# Altium PCB machcauH.PcbDoc
Units mm, origin at the board's own origin, x right, y up, seen from the top; angles counter-clockwise.
Board outline 60 x 60 mm, 2 copper layers (Top Layer, Bottom Layer); 34 components, 30 nets, 89 pads, 8 vias.
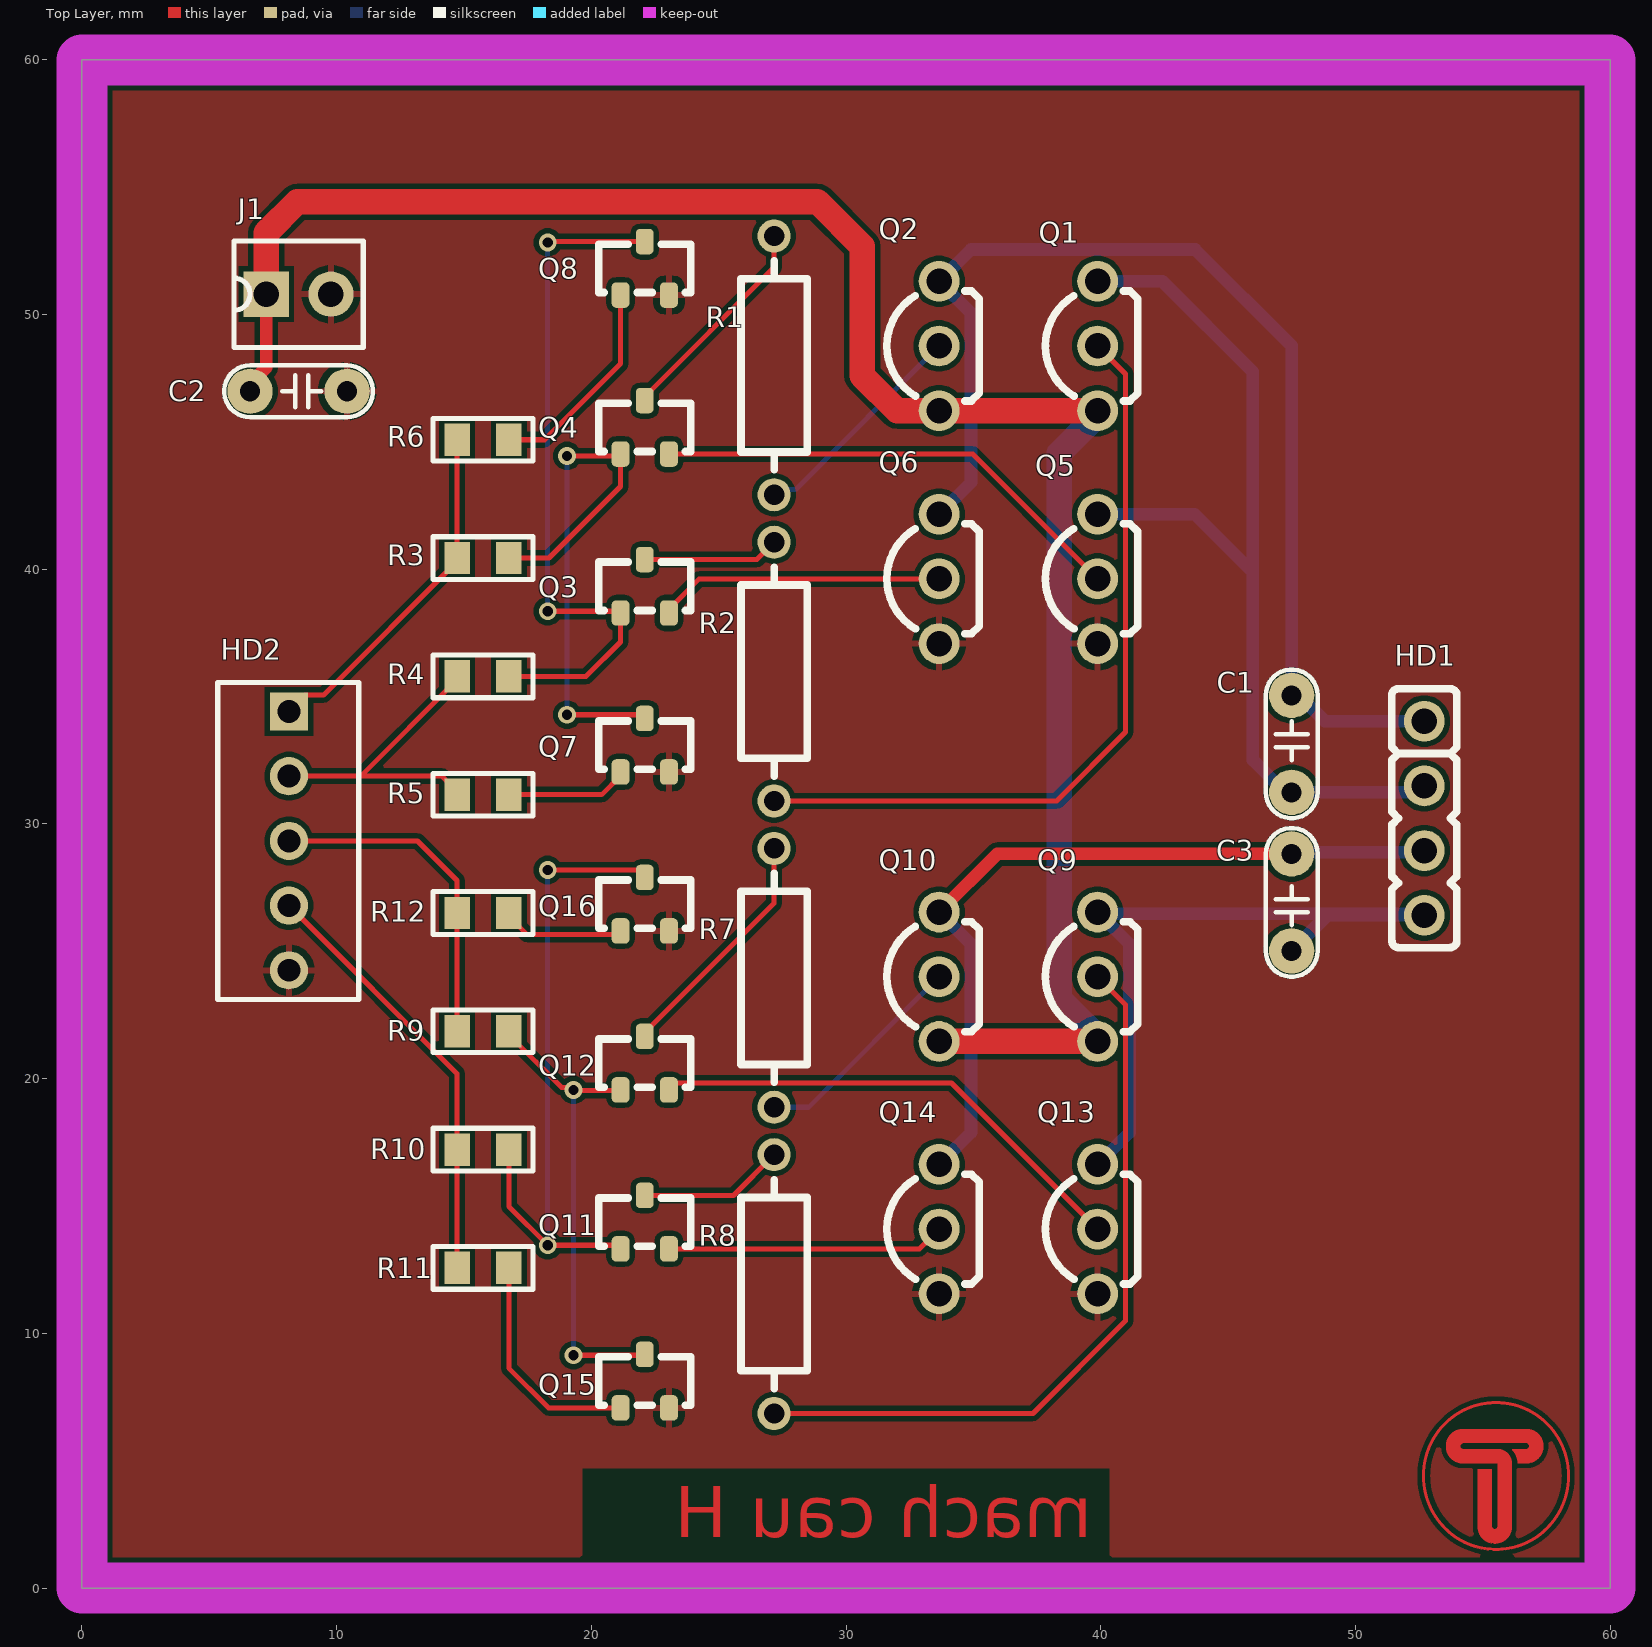
[diagram p0: Top Layer view]
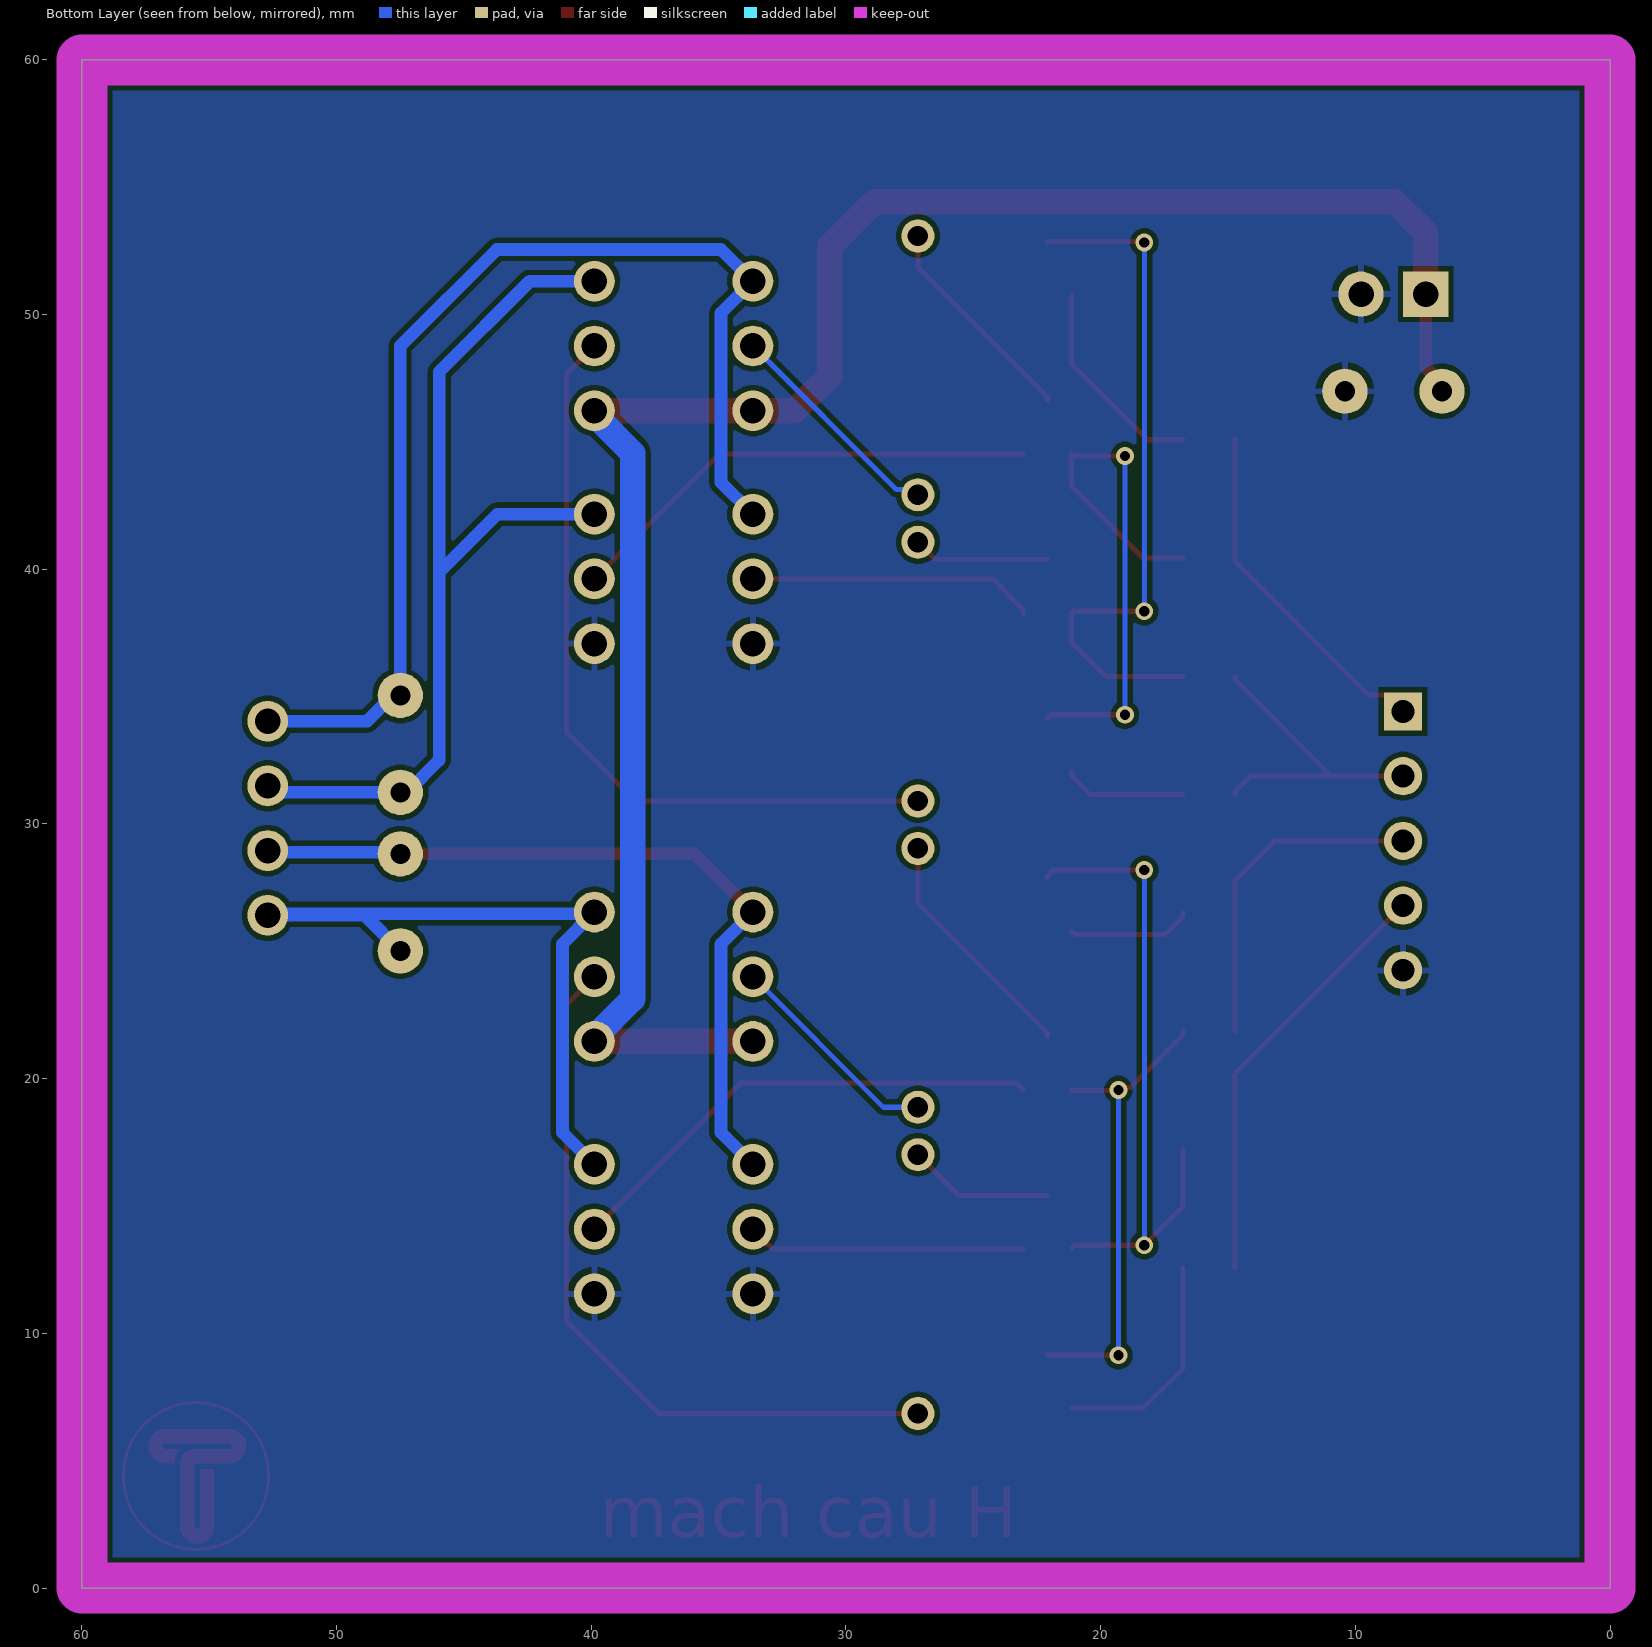
[diagram p1: Bottom Layer view, seen from below]
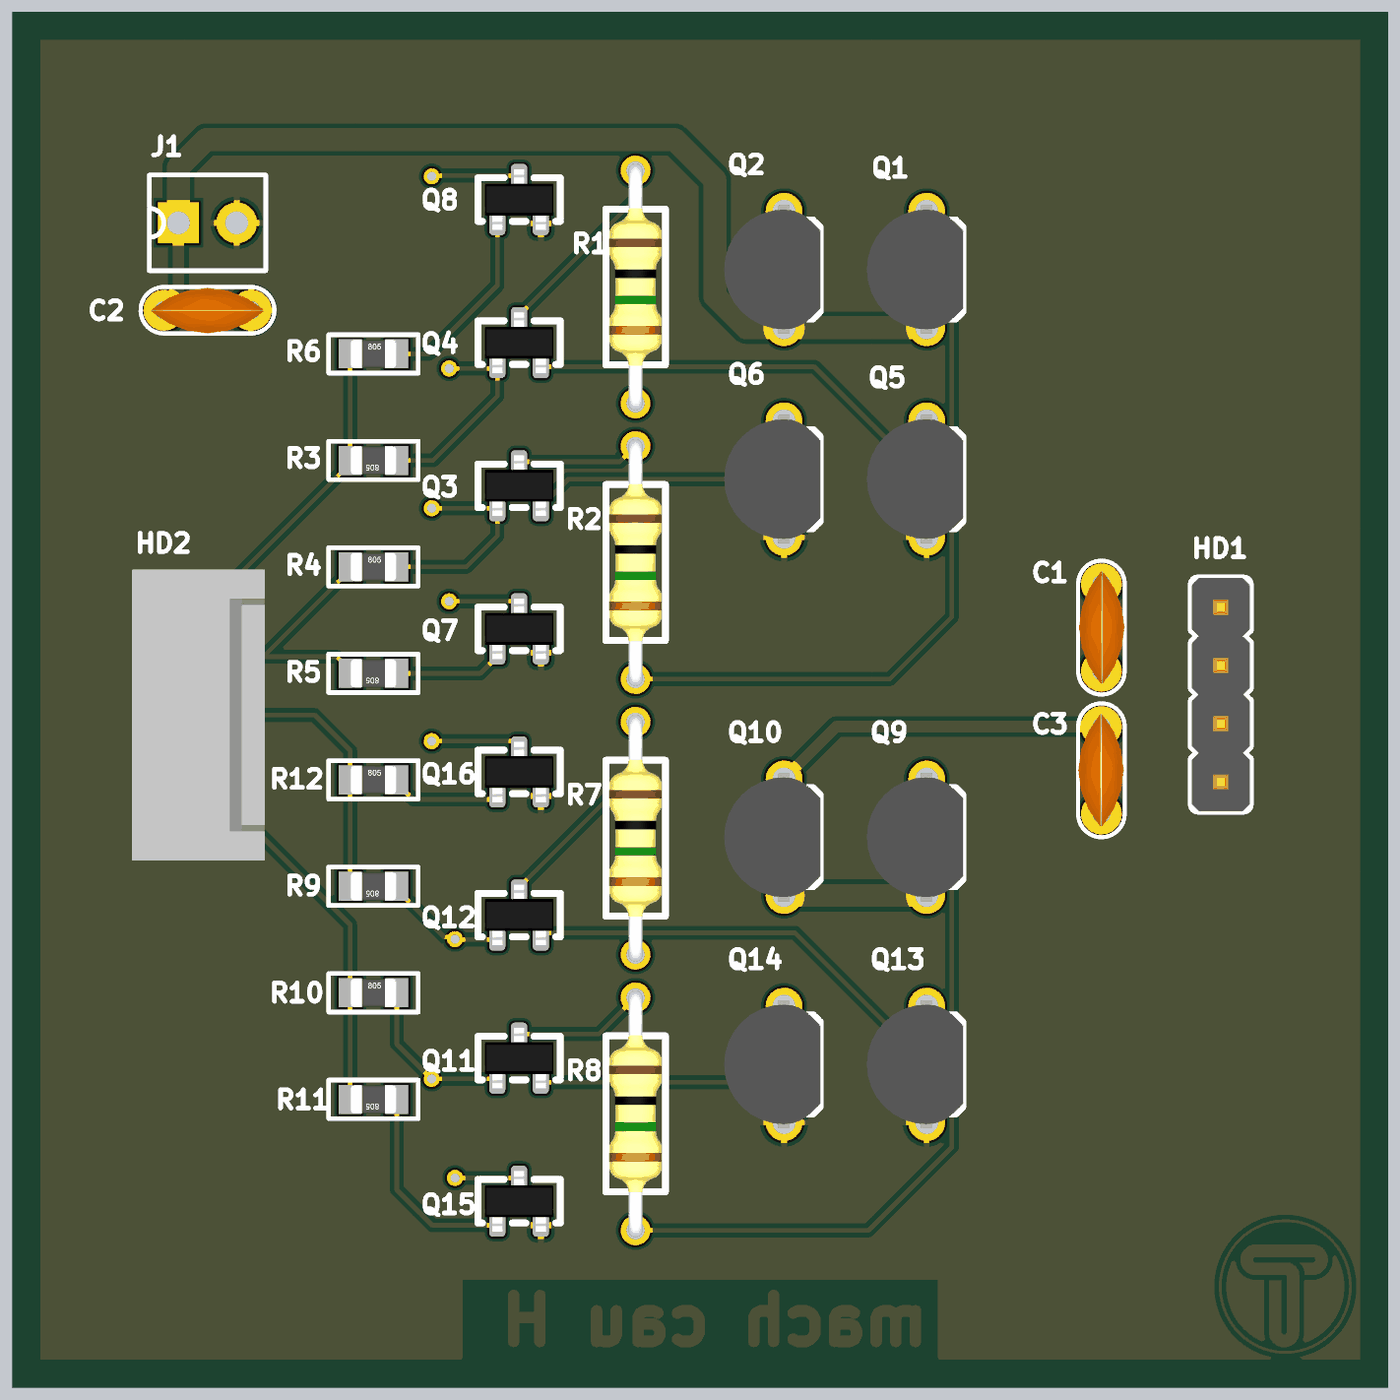
[diagram p2: 3D render of the assembled board from above, using the file's embedded part models]

## Layer stack, top to bottom
Top Solder: solder mask 0.0102, Solder Resist, Dk 3.5
Top Layer: signal copper 0.0356
Dielectric 1: dielectric 0.32, FR-4, Dk 4.8
Bottom Layer: signal copper 0.0356
Bottom Solder: solder mask 0.0102, Solder Resist, Dk 3.5

## Board outline
0,0 0,60 60,60 60,0

## Design rules (kind name [scope] priority, off if disabled: settings)
Clearance [All] p1: gap=0.2 ignorepadtopadclearanceinfootprint=FALSE
PolygonConnect [All] p1: connectstyle=Relief reliefconductorwidth=0.254 reliefentries=4 polygonreliefangle="90 Angle" airgapwidth=0.254
RoutingVias RoutingVias_power [InNetClass('Power_class')] p1: holewidth=0.7 width=1.1 viastyle="Through Hole" minholewidth=0.7 minwidth=1.1 maxholewidth=0.7 maxwidth=1.1
RoutingVias RoutingVias_signal [All] p2: holewidth=0.4 width=0.7 viastyle="Through Hole" minholewidth=0.4 minwidth=0.7 maxholewidth=0.4 maxwidth=0.7
SolderMaskExpansion [All] p1: expansion=0.102 istentingtop=FALSE
Width Width_power [InNetClass('Power_class')] p1: maxlimit=2 minlimit=0.5 preferedwidth=1
Width Width_signal [All] p2: maxlimit=0.2 minlimit=0.2 preferedwidth=0.2
30 further rules are at their usual default settings.

## Classes and differential pairs
net class Power_class: GND M_A M_B M_C M_D VCC

## Components (designator, comment, footprint, x,y, rotation, side; value= is the part's Value field where it differs from the comment)
C1 "103" CN1.5#1 47.498,35.052 r270 top value=0.01uF
C2 "103" CN1.5#2 10.414,46.99 r180 top value=0.01uF
C3 "103" CN1.5#1 47.498,25.019 r90 top value=0.01uF
HD1 "Header 4" Header_4 52.705,30.226 r270 top
HD2 "Header5" HDR5 8.128,34.417 r270 top
J1 "JP2" CON2 7.239,50.8 r90 top value="Connector 2"
Q1 "SS8550" SS8550 39.878,48.768 r90 top
Q2 "SS8550" SS8550 33.655,48.768 r90 top
Q3 "2SC1815-HF" 2SC1815-HF 22.098,39.334 r0 top
Q4 "2SC1815-HF" 2SC1815-HF 22.098,45.575 r0 top
Q5 "SS8050" SS8050 39.878,39.624 r90 top
Q6 "SS8050" SS8050 33.655,39.624 r90 top
Q7 "2SC1815-HF" 2SC1815-HF 22.098,33.093 r0 top
Q8 "2SC1815-HF" 2SC1815-HF 22.098,51.816 r0 top
Q9 "SS8550" SS8550 39.878,24.003 r90 top
Q10 "SS8550" SS8550 33.655,24.003 r90 top
Q11 "2SC1815-HF" 2SC1815-HF 22.098,14.369 r0 top
Q12 "2SC1815-HF" 2SC1815-HF 22.098,20.61 r0 top
Q13 "SS8050" SS8050 39.878,14.097 r90 top
Q14 "SS8050" SS8050 33.655,14.097 r90 top
Q15 "2SC1815-HF" 2SC1815-HF 22.098,8.128 r0 top
Q16 "2SC1815-HF" 2SC1815-HF 22.098,26.851 r0 top
R1 "Res2" "RES 1/4W CFR25" 27.178,53.086 r270 top value=1K
R2 "Res2" "RES 1/4W CFR25" 27.178,41.063 r270 top value=1K
R3 "R0603" "DIEN TRO 0805" 15.748,40.44 r0 top value="2K2, 1/8W"
R4 "R0603" "DIEN TRO 0805" 15.748,35.796 r180 top value="2K2, 1/8W"
R5 "R0603" "DIEN TRO 0805" 15.748,31.151 r0 top value="2K2, 1/8W"
R6 "R0603" "DIEN TRO 0805" 15.748,45.085 r180 top value="2K2, 1/8W"
R7 "Res2" "RES 1/4W CFR25" 27.178,29.041 r270 top value=1K
R8 "Res2" "RES 1/4W CFR25" 27.178,17.018 r270 top value=1K
R9 "R0603" "DIEN TRO 0805" 15.748,21.862 r0 top value="2K2, 1/8W"
R10 "R0603" "DIEN TRO 0805" 15.748,17.218 r180 top value="2K2, 1/8W"
R11 "R0603" "DIEN TRO 0805" 15.748,12.573 r0 top value="2K2, 1/8W"
R12 "R0603" "DIEN TRO 0805" 15.748,26.507 r180 top value="2K2, 1/8W"

## Footprints (in the part's own frame and the unit in brackets; to place one, negate y for a bottom-side part, rotate by r counter-clockwise, add the part's x,y. Pads: shape width x height; smd on the part's side, far side on the other; paste and mask are expansions set on the pad)
2SC1815-HF [mm] "SOT23-3"
  rrect50% 0.7x1 smd: 1(-0.95,-1.05) 2(0.95,-1.05) 3(0,1.05)
  silkscreen extent -1.8,-0.95 1.8,0.95, body extent -1.5,-1.32 1.5,1.32, height 1.08
CN1.5#1 [mil]
  round 70 hole 31: 1(0,0) 2(150,0)
  silkscreen extent -40,-40 190,40, body extent -22,-39 172,40, height 254
CN1.5#2 [mil]
  round 70 hole 31: 1(0,0)
  round 70 hole 30.98: 2(150,0)
  silkscreen extent -40,-40 190,40, body extent -22,-39 172,40, height 254
CON2 [mil]
  rect 70x70 hole 39.37 unplated: 1(0,0)
  round 70 hole 39.37 unplated: 2(0,-100)
  silkscreen extent -82,-150 82,50
"DIEN TRO 0805" [mm] "Chip Resistor; Body 2.0 x 1.3 mm (LxW typ)"
  rect 1x1.27 smd: 1(-1.016,0) 2(1.016,0)
  silkscreen extent -1.96,-0.84 1.96,0.84, body extent -1,-0.62 1,0.63, height 0.78
HDR5 [mm] "Connector; Header; 5 Position"
  rect 1.5x1.5 hole 0.9: 1(0,0)
  round 1.5 hole 0.9: 2(2.54,0) 3(5.08,0) 4(7.62,0) 5(10.16,0)
  silkscreen extent -1.14,-2.79 11.3,2.74, body extent -1.27,-2.92 11.43,2.88, height 11.72
Header_4 [mm] "Connector DIP, 4Pin_2.54mm"
  round 1.6 hole 1 mask+0.1: 1(-3.81,0) 2(-1.27,0) 3(1.27,0) 4(3.81,0)
  silkscreen extent -5.08,-1.28 5.08,1.28, body extent -5.08,-1.27 5.08,1.27, height 10.1
"RES 1/4W CFR25" [mm] "Axial Device, Thru-Hole; 2 Leads fi 0.55"
  round 1.3 hole 0.8 mask+0.1: 1(0,0) 2(10.16,0)
  silkscreen extent 0.98,-1.3 9.18,1.3, body extent -0.3,-1.16 10.47,1.16, height 2.93
SS8050 [mm] "TO-92 Bent Lead, Flat Index; 3 In-Line, Axial Leads; Body Dia. 4.5mm; Leads 0.51 x 0.48 mm (max)"
  round 1.6 hole 1 mask+0.1: 1(-2.54,0) 2(0,0) 3(2.54,0)
  silkscreen extent -2.16,-1.57 2.16,2.05, body extent -2.79,-1.59 2.79,2.61, height 10
SS8550 [mm] "TO-92 Bent Lead, Flat Index; 3 In-Line, Axial Leads; Body Dia. 4.5mm; Leads 0.51 x 0.48 mm (max)"
  round 1.6 hole 1 mask+0.1: 1(-2.54,0) 2(0,0) 3(2.54,0)
  silkscreen extent -2.16,-1.57 2.16,2.05, body extent -2.79,-1.59 2.79,2.61, height 10

## Part data
C1 C2 C3: library part CN1.5, "Cap np 682pF => 104pF"
HD1: library part Header4
HD2: "Header IDC, 5 x 1 Pin Vertical 2.54mm Pitch (Non-Boxed, Male)", Manufacturer="W¨¹rth Elektronik eiSos GmbH", partNo=613002143121, ComponentLink1 Description=Manufacturer, ComponentLink1URL=http://www.we-online.com, ComponentLink2 Description=Datasheet, ComponentLink2URL=http://katalog.we-online.de/em/datasheet/6130xx143121.pdf, Created by="Karrer Zheng", Created Date="29 March 2013", NoPins=02
J1: library part Con2, "Connector 2"
Q1 Q2 Q9 Q10: "Trans PNP -25V -1.5A TO-92", ComponentLink1Description=Datasheet, ComponentLink1URL="D:\Dropbox\Datasheets\Transistors\N Channel Bipolar\SS8550.pdf", Unit Price=0.0476
Q3 Q4 Q7 Q8 Q11 Q12 Q15 Q16: "Trans NPN 50V 150mA SOT-23", ComponentLink1Description=Datasheet, ComponentLink1URL="D:\Dropbox\Datasheets\Transistors\P Channel Bipolar\2SC1815-HF.pdf", Unit Price=0.0286
Q5 Q6 Q13 Q14: "Trans NPN 25V 1.5A TO-92", ComponentLink1Description=Datasheet, ComponentLink1URL="D:\Dropbox\Datasheets\Transistors\P Channel Bipolar\SS8050.pdf", Unit Price=0.0476
R1 R2 R7 R8: "Resistor", LatestRevisionDate=17-Jul-2002, LatestRevisionNote="Re-released for DXP Platform.", PackageDescription="Axial Device, Thru-Hole; 2 Leads; 0.4 in Pin Spacing", PackageReference=AXIAL-0.4, Published=8-Jun-2000, Publisher="Altium Limited"
R3 R4 R5 R6 R9 R10 R11 R12: "Resistor SMD 0603", LatestRevisionDate=17-Jul-2002, LatestRevisionNote="Re-released for DXP Platform.", PackageReference=AXIAL-0.4, Published=8-Jun-2000, Publisher="Altium Limited"

## Via types
v1: diameter 0.7, hole 0.4, Top Layer to Bottom Layer, 8 vias

## Nets (pads, with @x,y where several pads share a name; then routed paths per layer and width w, separated by ;. In a path a pad name is that pad's centre, name@x,y a point inside that pad or via, vN(x,y) a via of type N, cw(c..) or ccw(c..) an arc to the next point about the centre after c; other vN are vias at no path point)
GND: C2.1 HD2.5 J1.2 Q5.1 Q6.1 Q7.2 Q8.2 Q13.1 Q14.1 Q15.2 Q16.2
IN_A: HD2.1 R3.1 R6.2 | length 13.8
  Top Layer w0.2: HD2.1 8.778,35.067 9.494,35.067 14.732,40.305 R3.1 R6.2
IN_B: HD2.2 R4.2 R5.1 | length 12.5
  Top Layer w0.2: HD2.2 10.948,31.877 ; R5.1 14.732,31.286 14.141,31.877 10.948,31.877 ; R4.2 14.732,35.661 10.948,31.877
IN_C: HD2.3 R9.1 R12.2 | length 13.2
  Top Layer w0.2: HD2.3 13.174,29.337 14.732,27.779 R9.1
IN_D: HD2.4 R10.2 R11.1 | length 17
  Top Layer w0.2: HD2.4 14.732,20.193 R10.2 R11.1
M_A: C1.1 HD1.1 Q2.3 Q6.3 | length 45.5
  Bottom Layer w0.5: Q6.3 34.905,43.414 34.905,50.058 Q2.3 34.905,52.558 43.708,52.558 47.498,48.768 C1.1 47.784,35.052 48.8,34.036 HD1.1
M_B: C1.2 HD1.2 Q1.3 Q5.3 | length 37.2
  Bottom Layer w0.5: Q5.3 43.688,42.164 45.974,39.878 ; Q1.3 42.418,51.308 45.974,47.752 45.974,39.878 ; HD1.2 52.407,31.496 52.153,31.242 47.244,31.242 45.974,32.512 45.974,39.878
M_C: C3.2 HD1.3 Q10.3 Q14.3 | length 31
  Top Layer w0.5: Q10.3 35.941,28.829 C3.2
  Bottom Layer w0.5: Q14.3 34.905,17.887 34.905,25.293 Q10.3 ; C3.2 47.561,28.892 52.642,28.892 HD1.3
M_D: C3.1 HD1.4 Q9.3 Q13.3 | length 29.4
  Bottom Layer w0.5: Q13.3 41.128,17.887 41.128,25.293 Q9.3@39.941,26.479 ; Q9.3 Q9.3@39.941,26.479 ; C3.1 48.895,26.416 HD1.4 ; HD1.4@52.642,26.479 Q9.3@39.941,26.479
NetQ1_2: Q1.2 R2.2 | length 30.5
  Top Layer w0.2: R2.2 38.269,30.903 40.978,33.612 40.978,47.668 Q1.2
NetQ2_2: Q2.2 R1.2 | length 8.9
  Bottom Layer w0.2: R1.2 27.388,43.136 28.023,43.136 Q2.2
NetQ3_1: Q3.1 Q8.3 R4.1 | length 27.3
  Top Layer w0.2: R4.1 19.794,35.796 21.148,37.15 Q3.1 21.078,38.354 v1(18.288,38.354) ; v1(18.288,52.832) 18.322,52.866 Q8.3
  Bottom Layer w0.2: v1(18.288,38.354) v1(18.288,52.832)
NetQ3_3: Q3.3 R2.1 | length 5.4
  Top Layer w0.2: Q3.3 26.498,40.384 R2.1
NetQ4_1: Q4.1 Q7.3 R3.2 | length 22.2
  Top Layer w0.2: R3.2 18.342,40.44 21.148,43.246 Q4.1 21.073,44.45 v1(19.05,44.45) ; v1(19.05,34.29) 21.951,34.29 Q7.3
  Bottom Layer w0.2: v1(19.05,34.29) v1(19.05,44.45)
NetQ4_3: Q4.3 R1.1 | length 8.6
  Top Layer w0.2: Q4.3 22.098,46.775 27.178,51.855 R1.1
NetQ7_1: Q7.1 R5.2 | length 4.8
  Top Layer w0.2: R5.2 20.407,31.151 21.148,31.893 Q7.1
NetQ8_1: Q8.1 R6.1 | length 8.3
  Top Layer w0.2: R6.1 18.161,45.085 21.148,48.072 Q8.1
NetQ9_2: Q9.2 R8.2 | length 29.3
  Top Layer w0.2: R8.2 37.338,6.858 40.978,10.498 40.978,22.903 Q9.2
NetQ10_2: Q10.2 R7.2 | length 8.6
  Bottom Layer w0.2: R7.2 28.533,18.881 Q10.2
NetQ11_1: Q11.1 Q16.3 R10.1 | length 26
  Top Layer w0.2: R10.1 16.764,14.986 v1(18.288,13.462) 21.005,13.462 Q11.1 ; v1(18.288,28.194) 21.854,28.194 22.098,27.95 Q16.3
  Bottom Layer w0.2: v1(18.288,13.462) v1(18.288,28.194)
NetQ11_3: Q11.3 R8.1 | length 5.7
  Top Layer w0.2: Q11.3 25.579,15.419 R8.1
NetQ12_1: Q12.1 Q15.3 R9.2 | length 18.7
  Top Layer w0.2: R9.2 16.764,21.727 18.837,19.654 19.208,19.654 v1(19.304,19.558) 19.323,19.539 21.127,19.539 Q12.1 ; v1(19.304,9.144) 22.064,9.144 Q15.3
  Bottom Layer w0.2: v1(19.304,9.144) v1(19.304,19.558)
NetQ12_3: Q12.3 R7.1 | length 9.5
  Top Layer w0.2: Q12.3 22.098,21.81 27.178,26.89 R7.1
NetQ15_1: Q15.1 R11.2 | length 9
  Top Layer w0.2: R11.2 16.764,8.636 18.322,7.078 Q15.1
NetQ16_1: Q16.1 R12.1 | length 4.9
  Top Layer w0.2: R12.1 16.764,26.372 17.482,25.654 21.001,25.654 Q16.1
TA: Q4.2 Q5.2 | length 18.9
  Top Layer w0.2: Q4.2 34.977,44.525 Q5.2
TB: Q3.2 Q6.2 | length 11.3
  Top Layer w0.2: Q3.2 23.048,38.434 24.238,39.624 Q6.2
TC: Q12.2 Q13.2 | length 19.3
  Top Layer w0.2: Q12.2 23.048,19.586 23.292,19.831 34.144,19.831 Q13.2
TD: Q11.2 Q14.2 | length 10.9
  Top Layer w0.2: Q11.2 32.877,13.319 Q14.2
VCC: C2.2 J1.1 Q1.1 Q2.1 Q9.1 Q10.1 | length 78.2
  Top Layer w0.5: C2.2 6.604,47.287 7.239,47.922 J1.1
  Top Layer w1: J1.1 7.239,53.213 8.462,54.436 28.876,54.436 30.639,52.673 30.639,47.593 32.004,46.228 Q2.1 Q1.1 ; Q10.1 Q9.1
  Bottom Layer w1: Q9.1 39.878,21.625 38.378,23.125 38.378,44.566 39.878,46.066 Q1.1

## Polygon pours and split planes (outlines as drawn)
GND on Bottom Layer "GND_L02_P001" (solid, pour order 1): 0,0 0,59.944 59.944,59.944 59.944,0
GND on Top Layer "GND_L01_P003" (solid, pour order 3): 0,59.944 59.944,59.944 59.944,0 0,0

## Keep-outs
Keep-Out Layer:
  the board outline again, w2

## Other copper
Top Layer:
  region: 1391 vertices and 1 holes, not listed, extent 52.63,1.476 58.41,7.335
  region: 687 vertices and 0 holes, not listed, extent 53.564,1.752 57.378,6.244
  text "mach cau H" at 39.664,2.001 h2

## Silkscreen, mask and mechanical layers (free items; w line width, h text height)
Drill Drawing:
  circle w0.254: c-66.075,-36.237 r0.847
  lines w0.254: -66.921,-32.851 -66.498,-32.851 -66.075,-33.274 -65.651,-32.851 -65.228,-32.851 -65.651,-32.427 -65.228,-32.004 -65.651,-32.004 -66.075,-31.581 -66.498,-32.004 -66.921,-32.004 -66.498,-32.427 -66.921,-32.851 ; -66.921,-29.041 -66.498,-29.041 -66.498,-29.464 -65.651,-29.464 -65.651,-29.041 -65.228,-29.041 -65.228,-28.194 -65.651,-28.194 -65.651,-27.771 -66.498,-27.771 -66.498,-28.194 -66.921,-28.194 -66.921,-29.041 ; -66.921,-25.654 -66.075,-25.231 -65.228,-25.654 -65.651,-24.807 -65.228,-23.961 -66.075,-24.384 -66.921,-23.961 -66.498,-24.807 -66.921,-25.654 ; -66.921,-20.151 -65.228,-20.151 -66.075,-21.844 -66.921,-20.151 ; -66.921,-18.034 -65.228,-18.034 -65.228,-16.341 -66.921,-16.341 -66.921,-18.034 ; -66.921,-13.377 -66.075,-14.224 -65.228,-13.377 -66.075,-12.531 -66.921,-13.377
  lines w0.381: -68.44,-38.227 201.081,-38.227 ; -68.44,-11.557 201.081,-11.557 ; -54.448,-42.037 -54.448,-7.747 ; -40.735,-42.037 -40.735,-7.747 ; -12.804,-42.037 -12.804,-7.747 ; 0.046,-42.037 0.046,-7.747 ; 18.684,-42.037 18.684,-7.747 ; 56.773,-42.037 56.773,-7.747 ; 71.755,-42.037 71.755,-7.747 ; 90.698,-42.037 90.698,-7.747 ; 110.505,-42.037 110.505,-7.747 ; 132.19,-42.037 132.19,-7.747 ; 166.064,-42.037 166.064,-7.747 ; -68.44,-42.037 201.081,-42.037 201.081,-7.747 -68.44,-7.747 -68.44,-42.037
  text "Symbol" at -66.154,-10.414 h1.83
  text "Count" at -53.305,-10.414 h1.83
  text "Hole Size" at -39.592,-10.414 h1.83
  text "Plated" at -11.661,-10.414 h1.83
  text "Hole Type" at 1.189,-10.414 h1.83
  text "Drill Layer Pair" at 19.827,-10.414 h1.83
  text "Via/Pad" at 57.916,-10.414 h1.83
  text "Pad Shape" at 72.898,-10.414 h1.83
  text "Template" at 91.841,-10.414 h1.83
  text "Description" at 111.648,-10.414 h1.83
  text "Hole Tolerance (+)" at 133.333,-10.414 h1.83
  text "Hole Tolerance (-)" at 167.207,-10.414 h1.83
  text "1" at -53.305,-14.224 h1.52
  text "0.787mm (30.98mil)" at -39.592,-14.224 h1.52
  text "PTH" at -11.661,-14.224 h1.52
  text "Round" at 1.189,-14.224 h1.52
  text "Top Layer - Bottom Layer" at 19.827,-14.224 h1.52
  text "Pad" at 57.916,-14.224 h1.52
  text "Rounded" at 72.898,-14.224 h1.52
  text "c178h79" at 91.841,-14.224 h1.52
  text "2" at -53.305,-18.034 h1.52
  text "1.000mm (39.37mil)" at -39.592,-18.034 h1.52
  text "NPTH" at -11.661,-18.034 h1.52
  text "Round" at 1.189,-18.034 h1.52
  text "Top Layer - Bottom Layer" at 19.827,-18.034 h1.52
  text "Pad" at 57.916,-18.034 h1.52
  text "(Mixed)" at 72.898,-18.034 h1.52
  text "(Mixed)" at 91.841,-18.034 h1.52
  text "5" at -53.305,-21.844 h1.52
  text "0.787mm (31.00mil)" at -39.592,-21.844 h1.52
  text "PTH" at -11.661,-21.844 h1.52
  text "Round" at 1.189,-21.844 h1.52
  text "Top Layer - Bottom Layer" at 19.827,-21.844 h1.52
  text "Pad" at 57.916,-21.844 h1.52
  text "Rounded" at 72.898,-21.844 h1.52
  text "c178h79(1)" at 91.841,-21.844 h1.52
  text "5" at -53.305,-25.654 h1.52
  text "0.900mm (35.43mil)" at -39.592,-25.654 h1.52
  text "PTH" at -11.661,-25.654 h1.52
  text "Round" at 1.189,-25.654 h1.52
  text "Top Layer - Bottom Layer" at 19.827,-25.654 h1.52
  text "Pad" at 57.916,-25.654 h1.52
  text "(Mixed)" at 72.898,-25.654 h1.52
  text "(Mixed)" at 91.841,-25.654 h1.52
  text "8" at -53.305,-29.464 h1.52
  text "0.400mm (15.75mil)" at -39.592,-29.464 h1.52
  text "PTH" at -11.661,-29.464 h1.52
  text "Round" at 1.189,-29.464 h1.52
  text "Top Layer - Bottom Layer" at 19.827,-29.464 h1.52
  text "Via" at 57.916,-29.464 h1.52
  text "Rounded" at 72.898,-29.464 h1.52
  text "v70h40" at 91.841,-29.464 h1.52
  text "8" at -53.305,-33.274 h1.52
  text "0.800mm (31.50mil)" at -39.592,-33.274 h1.52
  text "PTH" at -11.661,-33.274 h1.52
  text "Round" at 1.189,-33.274 h1.52
  text "Top Layer - Bottom Layer" at 19.827,-33.274 h1.52
  text "Pad" at 57.916,-33.274 h1.52
  text "Rounded" at 72.898,-33.274 h1.52
  text "c130h80m140" at 91.841,-33.274 h1.52
  text "28" at -53.305,-37.084 h1.52
  text "1.000mm (39.37mil)" at -39.592,-37.084 h1.52
  text "PTH" at -11.661,-37.084 h1.52
  text "Round" at 1.189,-37.084 h1.52
  text "Top Layer - Bottom Layer" at 19.827,-37.084 h1.52
  text "Pad" at 57.916,-37.084 h1.52
  text "Rounded" at 72.898,-37.084 h1.52
  text "c160h100m170" at 91.841,-37.084 h1.52
  text "57 Total" at -53.305,-40.894 h1.52

## Text inside footprints (layer, text, board x,y; h text height)
HD1: Mechanical 2 "4" at 52.451,26.67 h0.8 r270; Mechanical 2 "1" at 52.451,34.29 h0.8 r270
Q1: Mechanical 1 "E" at 40.259,45.974 h0.8 r90; Mechanical 1 "B" at 40.259,48.514 h0.8 r90; Mechanical 1 "C" at 40.259,51.054 h0.8 r90
Q2: Mechanical 1 "E" at 34.036,45.974 h0.8 r90; Mechanical 1 "B" at 34.036,48.514 h0.8 r90; Mechanical 1 "C" at 34.036,51.054 h0.8 r90
Q3: Mechanical 2 "C" at 21.948,39.634 h0.8; Mechanical 2 "E" at 22.858,38.479 h0.8; Mechanical 2 "B" at 20.958,38.479 h0.8
Q4: Mechanical 2 "C" at 21.948,45.875 h0.8; Mechanical 2 "E" at 22.858,44.72 h0.8; Mechanical 2 "B" at 20.958,44.72 h0.8
Q5: Mechanical 1 "C" at 40.259,41.91 h0.8 r90; Mechanical 1 "B" at 40.259,39.37 h0.8 r90; Mechanical 1 "E" at 40.259,36.83 h0.8 r90
Q6: Mechanical 1 "E" at 34.036,36.83 h0.8 r90; Mechanical 1 "B" at 34.036,39.37 h0.8 r90; Mechanical 1 "C" at 34.036,41.91 h0.8 r90
Q7: Mechanical 2 "B" at 20.958,32.238 h0.8; Mechanical 2 "E" at 22.858,32.238 h0.8; Mechanical 2 "C" at 21.948,33.393 h0.8
Q8: Mechanical 2 "C" at 21.948,52.116 h0.8; Mechanical 2 "E" at 22.858,50.961 h0.8; Mechanical 2 "B" at 20.958,50.961 h0.8
Q9: Mechanical 1 "C" at 40.259,26.289 h0.8 r90; Mechanical 1 "B" at 40.259,23.749 h0.8 r90; Mechanical 1 "E" at 40.259,21.209 h0.8 r90
Q10: Mechanical 1 "C" at 34.036,26.289 h0.8 r90; Mechanical 1 "B" at 34.036,23.749 h0.8 r90; Mechanical 1 "E" at 34.036,21.209 h0.8 r90
Q11: Mechanical 2 "C" at 21.948,14.669 h0.8; Mechanical 2 "E" at 22.858,13.514 h0.8; Mechanical 2 "B" at 20.958,13.514 h0.8
Q12: Mechanical 2 "C" at 21.948,20.91 h0.8; Mechanical 2 "E" at 22.858,19.755 h0.8; Mechanical 2 "B" at 20.958,19.755 h0.8
Q13: Mechanical 1 "C" at 40.259,16.383 h0.8 r90; Mechanical 1 "B" at 40.259,13.843 h0.8 r90; Mechanical 1 "E" at 40.259,11.303 h0.8 r90
Q14: Mechanical 1 "C" at 34.036,16.383 h0.8 r90; Mechanical 1 "B" at 34.036,13.843 h0.8 r90; Mechanical 1 "E" at 34.036,11.303 h0.8 r90
Q15: Mechanical 2 "B" at 20.958,7.273 h0.8; Mechanical 2 "E" at 22.858,7.273 h0.8; Mechanical 2 "C" at 21.948,8.428 h0.8
Q16: Mechanical 2 "C" at 21.948,27.151 h0.8; Mechanical 2 "E" at 22.858,25.996 h0.8; Mechanical 2 "B" at 20.958,25.996 h0.8
R1: Mechanical 1 "R?" at 27.178,53.006 h0.8 r270
R2: Mechanical 1 "R?" at 27.178,40.983 h0.8 r270
R7: Mechanical 1 "R?" at 27.178,28.961 h0.8 r270
R8: Mechanical 1 "R?" at 27.178,16.938 h0.8 r270